# EAGLE board Drivers (EAGLE 6.5.0)
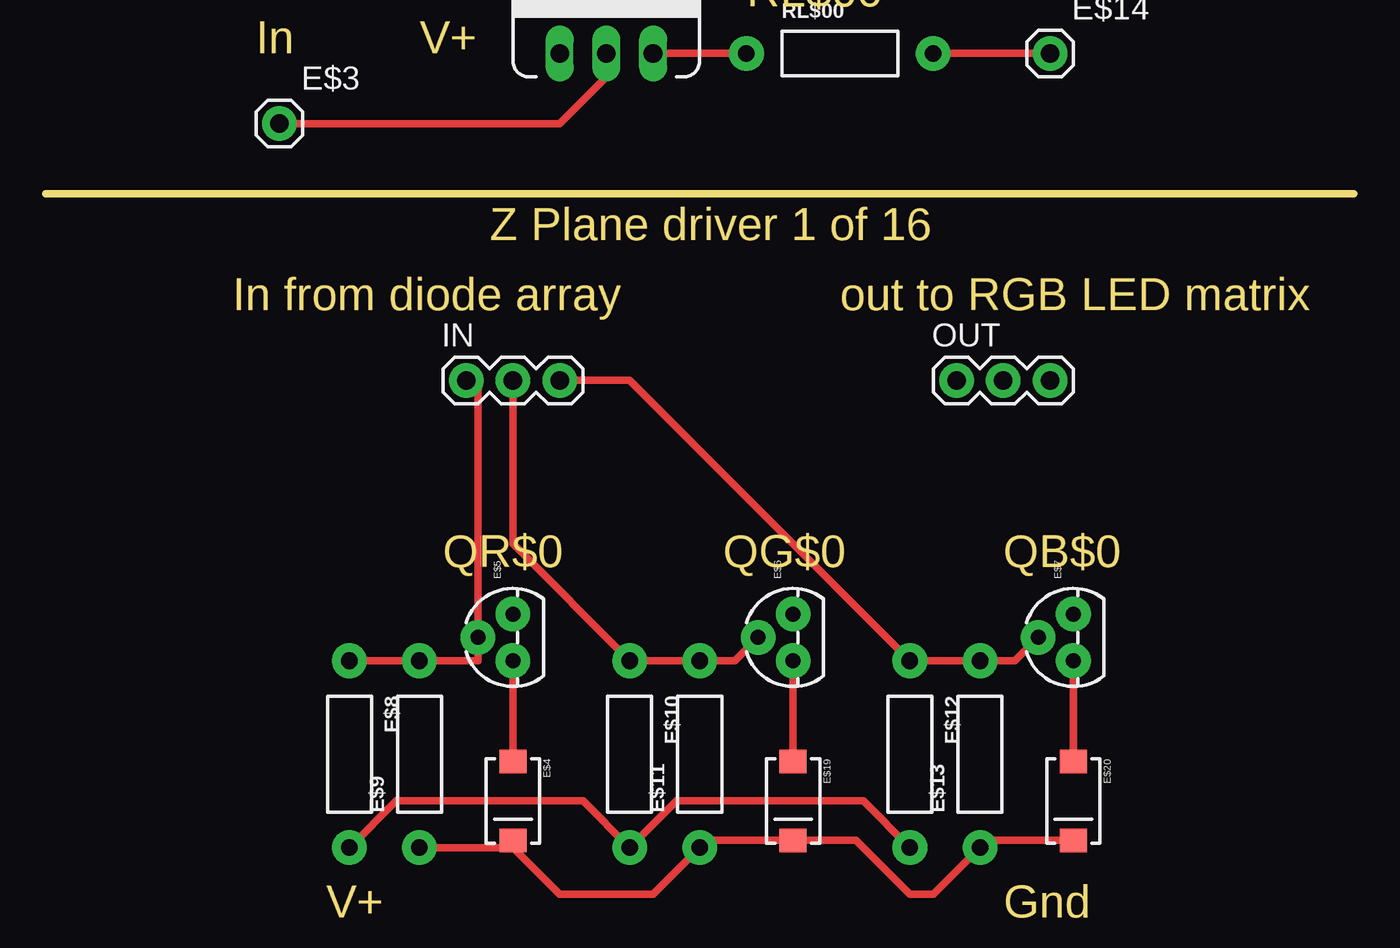
[diagram p0: board, top side]
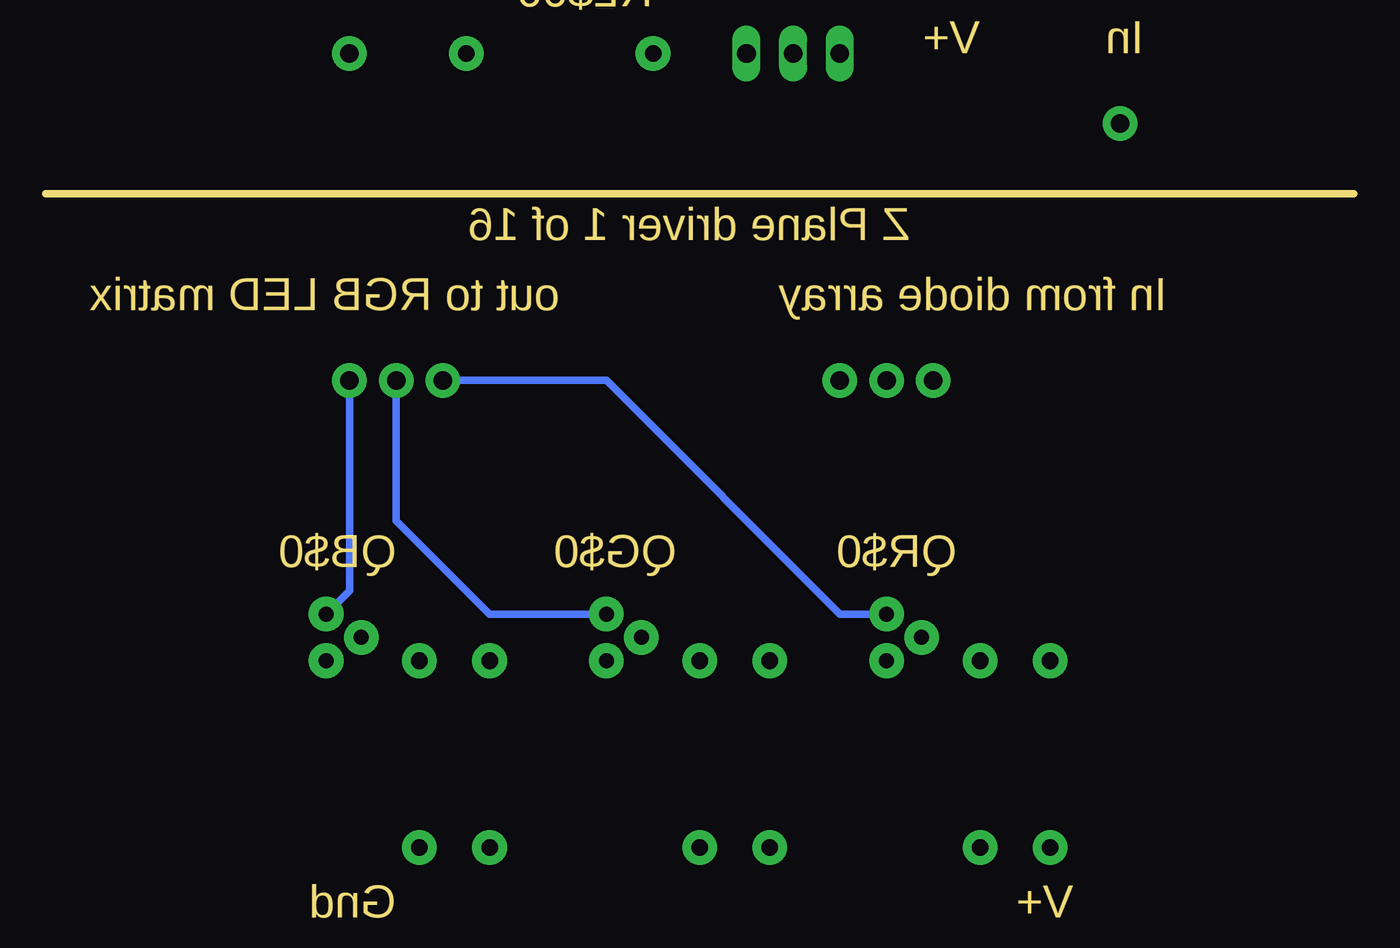
[diagram p1: board, bottom side, seen from below]

Size 71.12 x 0 mm. Coordinates in mm from the lower left corner, seen from the top.
Outline: 0,0 71.12,0
Copper layers (1*16): Top 0.035mm / dielectric 1.5mm / Bottom 0.035mm
Design rules "default": minimum track width 10mil, minimum drill 24mil, track to track 8mil, track to pad 8mil, pad to pad 8mil, via to via 8mil, smd to smd 8mil, copper to edge 40mil, drill to drill 8mil, minimum pad ring 10mil, minimum via ring 8mil, stop-mask expansion 4mil, vias tented up to drill 0mil, thermal gap 10mil

## Footprints (pad centres in the part's own frame; a part is rotated, then mirrored left to right if it is on the bottom)
1X01 = drill 1.016 pad 1.88: 1 0,0
SMA-DIODE = smd 1.27 x 1.47: A -2.15,0; C 2.15,0
TO-92 = drill 0.813 pad 1.88: 1 -1.27,0; 2 0,1.905; 3 1.27,0
AXIAL-0.4 = drill 0.9 pad 1.88: P$1 -5.08,0; P$2 5.08,0
1X03 = drill 1.016 pad 1.88: 1 0,0; 2 2.54,0; 3 5.08,0
TO220V = drill 1.016 long: 1 -2.54,0; 2 0,0; 3 2.54,0

## Placement (x,y rotation side)
E$3  [1X01]  12.7,3.81 0 top  (outside the outline)
E$4  [SMA-DIODE]  25.4,-33.02 270 top  (outside the outline)
E$5  [TO-92]  25.4,-24.13 90 top  (outside the outline)
E$6  [TO-92]  40.64,-24.13 90 top  (outside the outline)
E$7  [TO-92]  55.88,-24.13 90 top  (outside the outline)
E$8  [AXIAL-0.4]  16.51,-30.48 270 top  (outside the outline)
E$9  [AXIAL-0.4]  20.32,-30.48 90 top  (outside the outline)
E$10  [AXIAL-0.4]  31.75,-30.48 270 top  (outside the outline)
E$11  [AXIAL-0.4]  35.56,-30.48 90 top  (outside the outline)
E$12  [AXIAL-0.4]  46.99,-30.48 270 top  (outside the outline)
E$13  [AXIAL-0.4]  50.8,-30.48 90 top  (outside the outline)
E$14  [1X01]  54.61,7.62 0 top  (outside the outline)
E$19  [SMA-DIODE]  40.64,-33.02 270 top  (outside the outline)
E$20  [SMA-DIODE]  55.88,-33.02 270 top  (outside the outline)
IN  R G B  [1X03]  22.86,-10.16 0 top  (outside the outline)
OUT  R G B  [1X03]  49.53,-10.16 0 top  (outside the outline)
Q$00  [TO220V]  30.48,7.62 0 top  (outside the outline)
RL$00  [AXIAL-0.4]  43.18,7.62 0 top  (outside the outline)

## Library data of the parts
E$3 E$14 IN OUT = SparkFun-Connectors
E$4-E$7 E$19 E$20 Q$00 = SparkFun-DiscreteSemi
E$8-E$13 RL$00 = SparkFun-Resistors

## Nets
S$1: E$5.2 E$8.P$1 E$9.P$2 IN.1
S$2: E$6.2 E$10.P$1 E$11.P$2 IN.2
S$3: E$7.2 E$12.P$1 E$13.P$2 IN.3
S$4: E$5.3 OUT.1
S$5: E$6.3 OUT.2
S$6: E$7.3 OUT.3
S$7: E$7.1 E$20.A
S$8: E$8.P$2 E$10.P$2 E$12.P$2
S$9: E$6.1 E$19.A
S$10: E$3.1 Q$00.2
S$11: E$4.A E$5.1
S$12: E$4.C E$9.P$1 E$11.P$1 E$13.P$1 E$19.C E$20.C
S$13: Q$00.3 RL$00.P$1
S$14: E$14.1 RL$00.P$2

## Tracks (layer width: path | path; a pad name or v marks a point on that pad's centre or on a via)
S$1
  Top 0.406: IN.1 23.49,-10.16 E$5.2 23.49,-25.4 E$9.P$2 E$8.P$1
S$2
  Top 0.406: IN.2 25.4,-19.05 E$10.P$1 E$11.P$2 37.46,-25.4 E$6.2
S$3
  Top 0.406: IN.3 31.75,-10.16 E$12.P$1 E$13.P$2 52.7,-25.4 E$7.2
S$4
  Bottom 0.406: E$5.3 27.94,-22.86 40.64,-10.16 OUT.1
S$5
  Bottom 0.406: E$6.3 46.99,-22.86 52.07,-17.78 OUT.2
S$6
  Bottom 0.406: OUT.3 54.61,-21.59 E$7.3
S$7
  Top 0.406: E$7.1 E$20.A
S$8
  Top 0.406: E$8.P$2 19.05,-33.02 29.21,-33.02 E$10.P$2 34.29,-33.02 44.45,-33.02 E$12.P$2
S$9
  Top 0.406: E$6.1 E$19.A
S$10
  Top 0.406: E$3.1 27.94,3.81 30.48,6.35 Q$00.2
S$11
  Top 0.406: E$5.1 E$4.A
S$12
  Top 0.406: E$20.C 51.19,-35.17 E$13.P$1 48.26,-38.1 46.99,-38.1 44.06,-35.17 E$19.C 35.95,-35.17 E$11.P$1 33.02,-38.1 27.94,-38.1 25.4,-35.56 E$4.C 25.01,-35.56 E$9.P$1
S$13
  Top 0.406: Q$00.3 RL$00.P$1
S$14
  Top 0.406: RL$00.P$2 E$14.1

## Text on the board
Dimension: Column x Row driver 1 of 256 | Q$00 | Out | RL$00 | In | V+ | Z Plane driver 1 of 16 | In from diode array | out to RGB LED matrix | QR$0 | QG$0 | QB$0 | V+ | Gnd